# EAGLE board Bodacious Vihelmo-Blad (EAGLE 7.6.0)

Size 56.82 x 53.33 mm. Coordinates in mm from the lower left corner, seen from the top.
Outline: 0,0 56.82,0 56.82,53.33 0,53.33 0,0
Copper layers (1*16): Top 0.035mm / dielectric 1.5mm / Bottom 0.035mm
Design rules "default": minimum track width 10mil, minimum drill 24mil, track to track 8mil, track to pad 8mil, pad to pad 8mil, via to via 8mil, smd to smd 8mil, copper to edge 40mil, drill to drill 8mil, minimum pad ring 10mil, minimum via ring 8mil, stop-mask expansion 4mil, vias tented up to drill 0mil, thermal gap 10mil

## Footprints (pad centres in the part's own frame; a part is rotated, then mirrored left to right if it is on the bottom)
LED5MM = drill 0.813 octagon: A -1.27,0; K 1.27,0
2P-2.54-65/35MIL = drill 0.889 pad 1.651 square: 1 0,1.27 | drill 0.889 pad 1.651: 2 0,-1.27
0207/10 = drill 0.813 octagon: 1 -5.08,0; 2 5.08,0
DIP04YL = drill 0.813 long: 1 -3.81,-3.81; 2 -1.27,-3.81; 3 1.27,-3.81; 4 3.81,-3.81; 5 3.81,3.81; 6 1.27,3.81; 7 -1.27,3.81; 8 -3.81,3.81
DIL14 = drill 0.813 long: 1 -7.62,-3.81; 2 -5.08,-3.81; 3 -2.54,-3.81; 4 0,-3.81; 5 2.54,-3.81; 6 5.08,-3.81; 7 7.62,-3.81; 8 7.62,3.81; 9 5.08,3.81; 10 2.54,3.81; 11 0,3.81; 12 -2.54,3.81; 13 -5.08,3.81; 14 -7.62,3.81

## Placement (x,y rotation side)
D1  [LED5MM]  5,137.08 0 top  (outside the outline)
D2  [LED5MM]  5,149.78 0 top  (outside the outline)
D3  [LED5MM]  5,162.48 0 top  (outside the outline)
D4  [LED5MM]  5,175.18 0 top  (outside the outline)
P1  5V  [2P-2.54-65/35MIL]  5,187.88 0 top  (outside the outline)
R1  1k‎Ω  [0207/10]  5,35.48 0 top
R2  1k‎Ω  [0207/10]  5,48.18 0 top
R3  1k‎Ω  [0207/10]  5,60.88 0 top  (outside the outline)
R4  1k‎Ω  [0207/10]  5,73.58 0 top  (outside the outline)
R5  1k‎Ω  [0207/10]  5,86.28 0 top  (outside the outline)
R6  1k‎Ω  [0207/10]  5,98.98 0 top  (outside the outline)
R7  1k‎Ω  [0207/10]  5,111.68 0 top  (outside the outline)
R8  1k‎Ω  [0207/10]  5,124.38 0 top  (outside the outline)
SW1  [DIP04YL]  5,22.78 0 top
U1  [DIL14]  5,10.08 0 top

## Library data of the parts
D1-D4 P1 R1-R8 SW1 U1 = AUTODESK_CIRCUITS_BREADBOARD

## Nets
N$1: U1.5
N$2: U1.11
N$3: U1.12
N$4: U1.4
N$5: U1.13
N$6: U1.6
N$7: U1.8
N$8: P1.2 R1.1 R2.1 R3.1 R4.1 U1.14
N$9: U1.9
N$10: P1.1 R5.2 R6.2 R7.2 R8.2 U1.7
N$11: U1.10
N$12: R3.2 SW1.3
N$13: R4.2 SW1.4
N$14: D1.A SW1.5
N$15: R1.2 SW1.1
N$16: R2.2 SW1.2
N$17: SW1.6
N$18: D1.K R5.1
N$19: D2.K R6.1
N$20: D3.K R7.1
N$21: D4.K R8.1
N$22: D4.A SW1.8 U1.1
N$23: D3.A SW1.7 U1.2
N$24: D2.A U1.3

## Tracks (layer width: path | path; a pad name or v marks a point on that pad's centre or on a via)
N$8  (5 unrouted)
N$10  (5 unrouted)
N$12  (1 unrouted)
N$13  (1 unrouted)
N$14  (1 unrouted)
N$15  (1 unrouted)
N$16  (1 unrouted)
N$18  (1 unrouted)
N$19  (1 unrouted)
N$20  (1 unrouted)
N$21  (1 unrouted)
N$22  (2 unrouted)
N$23  (2 unrouted)
N$24  (1 unrouted)